# Altium PCB Igor's PCB.PcbDoc
Units mm, origin at the board's own origin, x right, y up, seen from the top; angles counter-clockwise.
Board outline 85 x 80 mm, 4 copper layers (Top Layer, Internal Plane 1, Internal Plane 2, Bottom Layer), stack 1.782 mm thick; 99 components, 55 nets, 302 pads, 0 vias.
Unrouted connection lines stored in the file: 190.
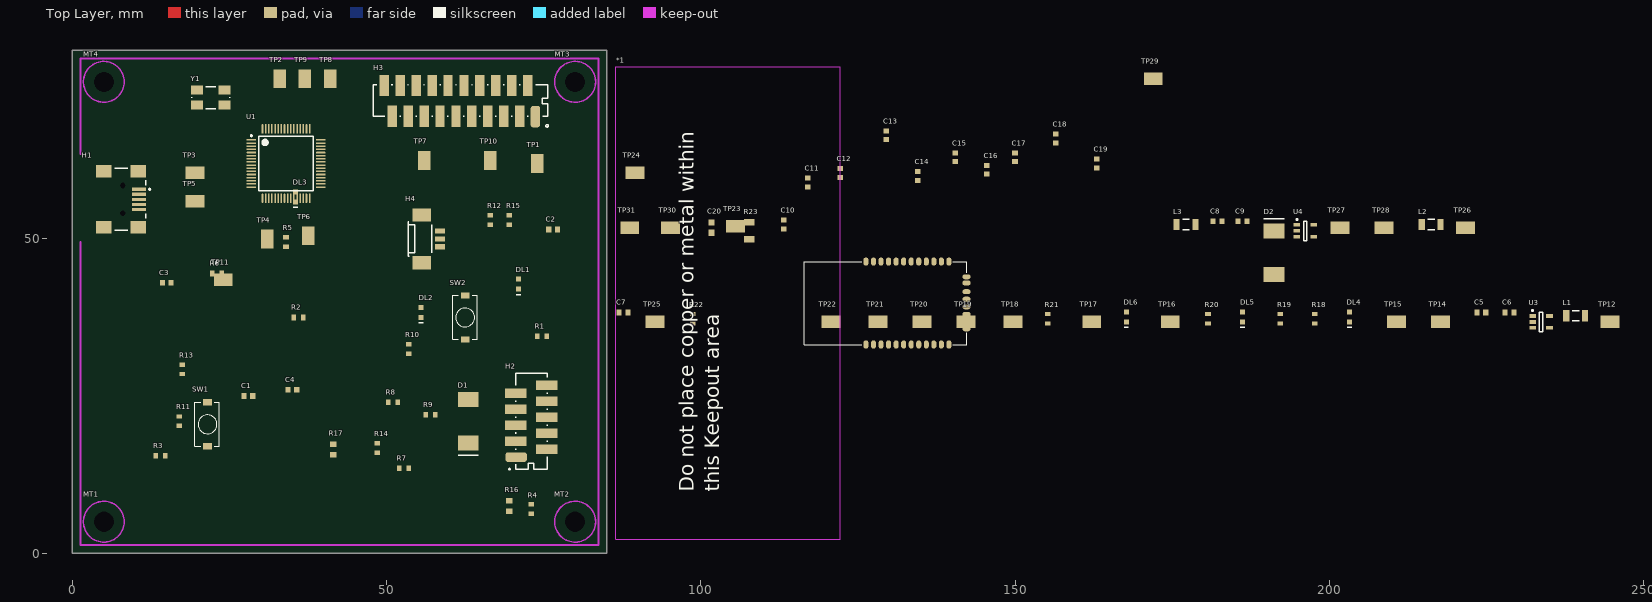
[diagram p0: Top Layer view]
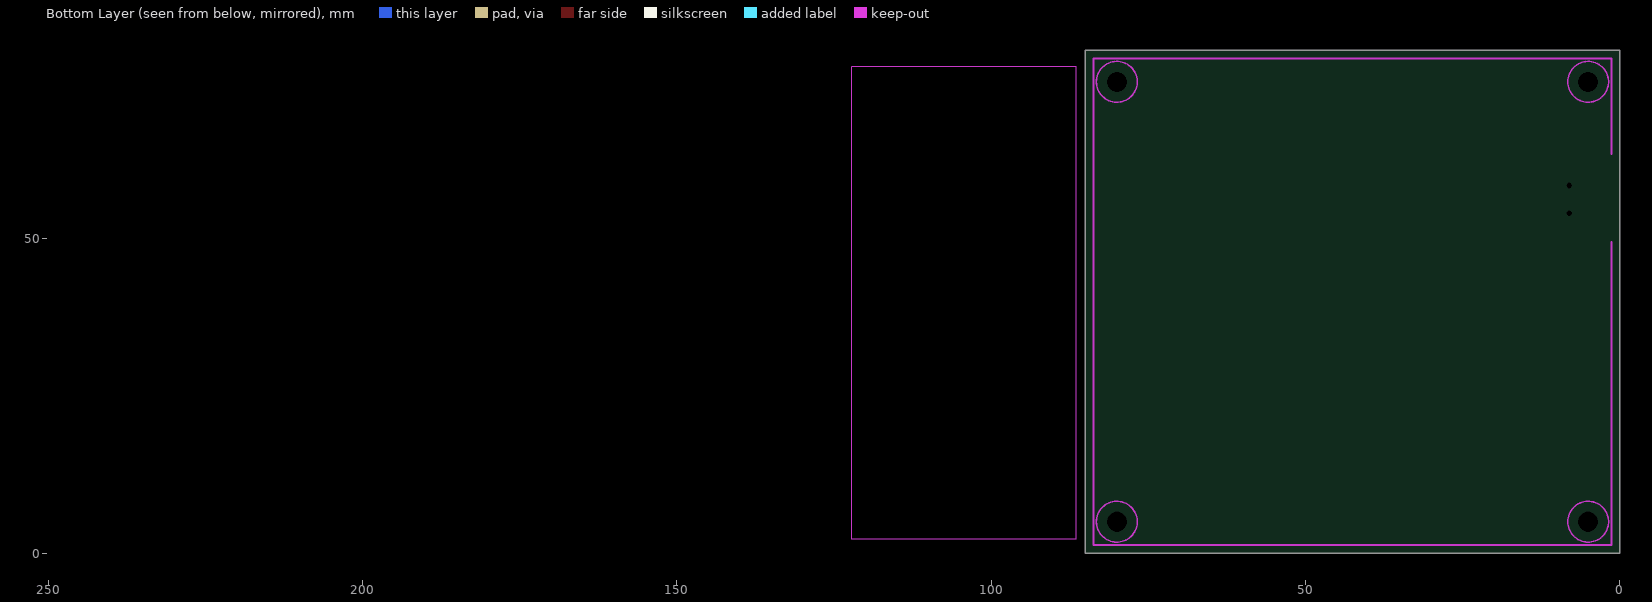
[diagram p1: Bottom Layer view, seen from below]
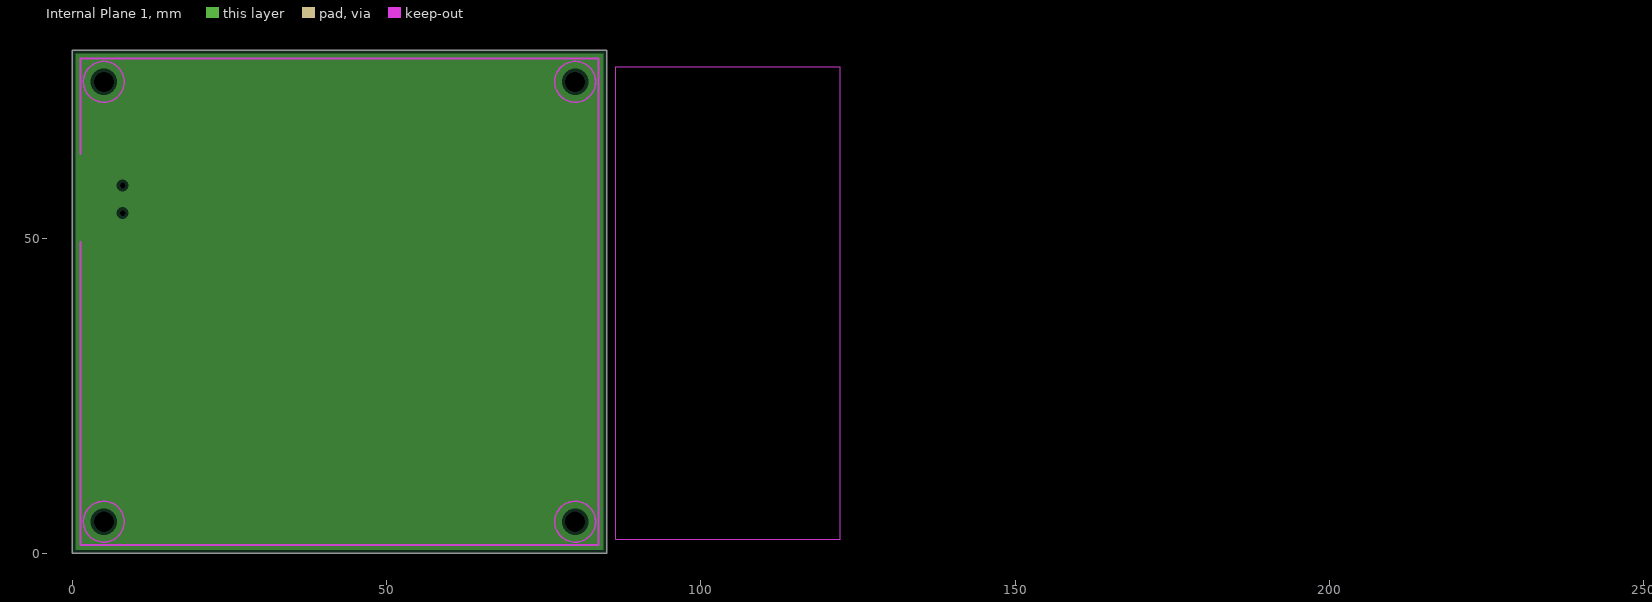
[diagram p2: Internal Plane 1, clearances drawn from the general rule]
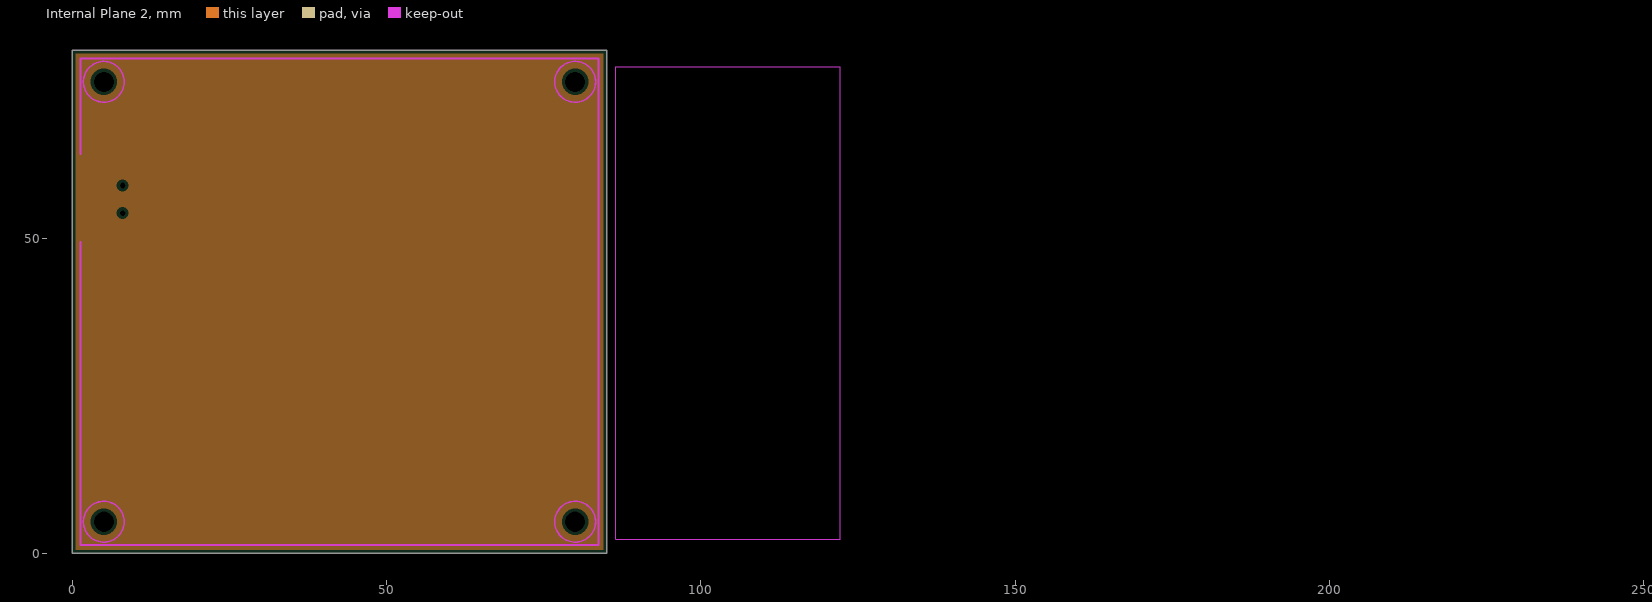
[diagram p3: Internal Plane 2, clearances drawn from the general rule]

## Layer stack, top to bottom
Top Solder: solder mask 0.0102, Solder Resist, Dk 3.5
Top Layer: signal copper 0.0356
Dielectric1: prepreg 0.32, FR-4, Dk 4.8
Internal Plane 1: plane copper 0.0356
Dielectric2: core 1, FR-4, Dk 4.8
Internal Plane 2: plane copper 0.0356
Dielectric3: prepreg 0.32, FR-4, Dk 4.8
Bottom Layer: signal copper 0.0356
Bottom Solder: solder mask 0.0102, Solder Resist, Dk 3.5

## Board outline
0,0 85,0 85,80 0,80

## Design rules (kind name [scope] priority, off if disabled: settings)
Clearance Min_Clearance_Circuit_Labs [All] p1: gap=0.15
DiffPairsRouting [All] p1: maxlimit=0.254 minlimit=0.254 mostfreqgap=0.254 toplayer_minwidth=0.381 toplayer_maxwidth=0.381 toplayer_prefwidth=0.381 bottomlayer_minwidth=0.381 bottomlayer_maxwidth=0.381 bottomlayer_prefwidth=0.381 maxuncoupledlength=12.7
FanoutControl Fanout_BGA [IsBGA] p1 off: bgadir=Out bgaviamode=Centered fanoutstyle=Auto fanoutdirection=Alternating viagrid=0.025 // Fanout_BGA (Default Rule)
HoleSize [All] p1: absolutevalues=TRUE maxlimit=10 minlimit=0.3 maxpercent=80.000 minpercent=20.000
MinimumAnnularRing [All] p1: minimumring=0.1
MinimumSolderMaskSliver [(HasFootprint('LQFP64_L') OR HasFootprint('SOT95P280X145-5N') OR HasFootprint('USB/SM0.8-6H5'))] p1: minsoldermaskwidth=0.11
NetAntennae [All] p1: netantennaetolerance=1
PasteMaskExpansion [All] p1 off: expansion=0.2
PlaneClearance [All] p1: clearance=0.508
PlaneConnect [All] p1: planeconnectstyle=Relief reliefexpansion=0.508 reliefentries=4 reliefconductorwidth=0.254 reliefairgap=0.254
PolygonConnect [All] p1: connectstyle=Relief reliefconductorwidth=0.254 reliefentries=4 polygonreliefangle="90 Angle" airgapwidth=0.254
RoomDefinition Communications_Power [InComponentClass('Communications_Power')] p1: confinementstyle=ConfineIn formatcopy=TRUE lockcomponents=FALSE outline 86.2,42.8 226.199,42.8 226.199,56.3 86.2,56.3
RoomDefinition Communications_Module [InComponentClass('Communications_Module')] p2: confinementstyle=ConfineIn formatcopy=TRUE lockcomponents=FALSE outline 86.2,34.8 248.699,34.8 248.699,41.8 86.2,41.8
RoomDefinition Communications_Board [InComponentClass('Communications_Board')] p3: confinementstyle=ConfineIn formatcopy=TRUE lockcomponents=FALSE outline 1.2,1.3 83.7,1.3 83.7,78.8 1.2,78.8
RoutingVias [All] p1: holewidth=0.5 width=1 viastyle="Through Hole" minholewidth=0.3 minwidth=0.6 maxholewidth=1 maxwidth=2
SMDNeckDown [All] p1 off: percent=50.000
SMDToCorner [All] p1: distance=98425
SMDToPlane [All] p1: distance=1968504
SilkToSolderMaskClearance SilkscreenOverComponentPads [IsPad] p1: minsilkscreentomaskgap=0.254 clearancetoexposedcopper=TRUE
SolderMaskExpansion [All] p1: expansion=0.102
ViasUnderSMD [All] p1: allowed=FALSE
Width [All] p1: maxlimit=2 minlimit=0.15 preferedwidth=0.3
21 further rules are at their usual default settings.

## Classes and differential pairs
component class Communications_Board: C1 C2 C3 C4 D1 DL1 DL2 DL3 H1 H2 H3 H4 MT1 MT2 MT3 MT4 R1 R2 R3 R4 R5 R6 R7 R8 R9 R10 R11 R12 R13 R14 R15 R16 R17 SW1 SW2 TP1 TP2 TP3 TP4 TP5 TP6 TP7 TP8 TP9 TP10 TP11 U1 Y1
component class Communications_Module: *1 C5 C6 C7 DL4 DL5 DL6 L1 R18 R19 R20 R21 R22 TP12 TP14 TP15 TP16 TP17 TP18 TP19 TP20 TP21 TP22 TP23 TP24 TP25 U3
component class Communications_Power: C8 C9 C10 C11 C12 C13 C14 C15 C16 C17 C18 C19 C20 D2 L2 L3 R23 TP26 TP27 TP28 TP29 TP30 TP31 U4
net class *1_Nets: +3V3COMM GND Net*1_2 Net*1_5 Net*1_6 Net*1_7 Net*1_8 Net*1_9 Net*1_10 Net*1_13 Net*1_14 Net*1_15 Net*1_16 Net*1_17 Net*1_18 Net*1_19 Net*1_20 Net*1_21 Net*1_22 Net*1_23 Net*1_24 Net*1_30 Net*1_31 Net*1_32 Net*1_33 Net*1_34 Net*1_35
net class C1_Nets: GND NetC1_2
net class C2_Nets: GND NetC2_2
net class C3_Nets: GND NetC3_2
net class C4_Nets: +3V3 GND
net class C5_Nets: +5VCOMM GND
net class C6_Nets: +3V3COMM GND
net class C7_Nets: +3V3COMM GND
net class C8_Nets: +5V GND
net class C9_Nets: +3V3 GND
net class C10_Nets: +3V3 GND
net class C11_Nets: +3V3 GND
net class C12_Nets: +3V3 GND
net class C13_Nets: +3V3 GND
net class C14_Nets: +3V3 GND
net class C15_Nets: GND VDDOUT
net class C16_Nets: GND VDDOUT
net class C17_Nets: GND VDDOUT
net class C18_Nets: GND VDDOUT
net class C19_Nets: GND NetC19_2
net class C20_Nets: GND NetC20_2
net class D1_Nets: +5V NetC3_2
net class D2_Nets: +5V NetD2_1
net class DL1_Nets: LED1 NetDL1_1
net class DL2_Nets: LED2 NetDL2_1
net class DL3_Nets: LED3 NetDL3_1
net class DL4_Nets: NetDL4_1 NetDL4_2
net class DL5_Nets: +3V3COMM NetDL5_1
net class DL6_Nets: Net*1_19 NetDL6_1
net class H1_Nets: GND NetH1_1 NetH1_4 USB_N USB_P
net class H2_Nets: GND NetC3_2 NetH2_3 NetH2_4 NetH2_9 NetH2_10 SCL SDA
net class H3_Nets: +3V3 GND NetH3_3 NetH3_11 NetH3_17 NetH3_19 NRST TCK TDI TDO TMS
net class H4_Nets: GPIO1 GPIO2 GPIO3
net class L1_Nets: +5VCOMM NetH1_1
net class L2_Nets: NetD2_1 VBUS
net class L3_Nets: NetC19_2 VDDOUT
net class R1_Nets: GND NetDL1_1
net class R2_Nets: GND NetDL2_1
net class R3_Nets: NetR3_1 NetR3_2
net class R4_Nets: GND NetDL3_1
net class R5_Nets: Net*1_16 NetR5_1
net class R6_Nets: Net*1_14 NetR6_1
net class R7_Nets: NetR7_2 USB_P
net class R8_Nets: NetR8_2 USB_N
net class R9_Nets: NetR9_2 SCL
net class R10_Nets: NetR9_2 SDA
net class R11_Nets: +3V3 NRST
net class R12_Nets: +3V3 TDO
net class R13_Nets: +3V3 TCK
net class R14_Nets: +3V3 TMS
net class R15_Nets: +3V3 TDI
net class R16_Nets: +5V "USB DETECT"
net class R17_Nets: GND "USB DETECT"
net class R18_Nets: +3V3COMM Net*1_20
net class R19_Nets: +3V3COMM Net*1_5
net class R20_Nets: Net*1_21 NetDL5_1
net class R21_Nets: GND NetDL6_1
net class R22_Nets: GND Net*1_22
net class R23_Nets: NetC19_2 NetC20_2
net class SW1_Nets: GND NetR3_2
net class SW2_Nets: GND NRST
net class TP1_Nets: +3V3
net class TP2_Nets: ERASE
net class TP3_Nets: USB_N
net class TP4_Nets: NetTP4_1
net class TP5_Nets: USB_P
net class TP6_Nets: NetTP6_1
net class TP7_Nets: NRST
net class TP8_Nets: TDO
net class TP9_Nets: TCK
net class TP10_Nets: TMS
net class TP11_Nets: TDI
net class TP12_Nets: NetH1_1
net class TP14_Nets: GND
net class TP15_Nets: NetTP15_1
net class TP16_Nets: Net*1_20
net class TP17_Nets: +3V3COMM
net class TP18_Nets: NetTP18_1
net class TP19_Nets: Net*1_19
net class TP20_Nets: Net*1_5
net class TP21_Nets: Net*1_16
net class TP22_Nets: Net*1_15
net class TP23_Nets: Net*1_14
net class TP24_Nets: Net*1_22
net class TP25_Nets: Net*1_13
net class TP26_Nets: VBUS
net class TP27_Nets: +3V3
net class TP28_Nets: VDDOUT
net class TP29_Nets: GND
net class TP30_Nets: GND
net class TP31_Nets: GND
net class U1_Nets: +3V3 ERASE GND GPIO1 GPIO2 GPIO3 LED1 LED2 LED3 Net*1_5 Net*1_13 Net*1_15 NetC1_2 NetC2_2 NetC19_2 NetR3_1 NetR5_1 NetR6_1 NetR7_2 NetR8_2 NetR9_2 NetTP4_1 NetTP6_1 NetTP15_1 NetU1_3 NetU1_4 NetU1_5 NetU1_6 NetU1_9 NetU1_10 NetU1_15 NetU1_16 NetU1_19 NetU1_21 NetU1_22 NetU1_27 NetU1_29 NetU1_30 NetU1_32 NetU1_34 NetU1_37 NetU1_59 NetU1_63 NRST SCL SDA TCK TDI TDO TMS "USB DETECT" VDDOUT
net class U3_Nets: +3V3COMM +5VCOMM GND NetTP15_1
net class U4_Nets: +3V3 +5V GND
net class Y1_Nets: NetC1_2 NetC2_2
differential pair USB: +USB_P -USB_N

## Components (designator, comment, footprint, x,y, rotation, side; value= is the part's Value field where it differs from the comment)
*1 "RN41" PCBComponent_1 129.7,39.8 r90 top
C1 "10pF" CAPC1608L 28,25 r0 top
C2 "10pF" CAPC1608L 76.5,51.5 r0 top
C3 "100nF" CAPC1608L 15,43 r0 top
C4 "100nF" CAPC1608L 35,26 r0 top
C5 "10uF" CAPC1608L 224.199,38.3 r0 top
C6 "10uF" CAPC1608L 228.699,38.3 r0 top
C7 "100pF" CAPC1608L 87.7,38.3 r0 top
C8 "10uF" CAPC1608L 182.2,52.8 r0 top
C9 "10uF" CAPC1608L 186.2,52.8 r0 top
C10 "100nF" CAPC1608L 113.2,52.3 r90 top
C11 "100nF" CAPC1608L 117,59 r90 top
C12 "100nF" CAPC1608L 122.175,60.5 r90 top
C13 "100nF" CAPC1608L 129.5,66.5 r90 top
C14 "100nF" CAPC1608L 134.5,60 r90 top
C15 "100nF" CAPC1608L 140.5,63 r90 top
C16 "100nF" CAPC1608L 145.5,61 r90 top
C17 "100nF" CAPC1608L 150,63 r90 top
C18 "100nF" CAPC1608L 156.5,66 r90 top
C19 "100nF" CAPC1608L 163,62 r90 top
C20 "4.7uF" CAPC1608N 101.7,51.8 r90 top
D1 "VS-30BQ015TRPBF" SMC 63,20.975 r270 top
D2 "VS-30BQ015TRPBF" SMC 191.2,47.8 r90 top
DL1 "Dark Green" WL-SMCW0603 71,42 r90 top
DL2 "Yellow" WL-SMCW0603 55.5,37.5 r90 top
DL3 "Red" WL-SMCW0603 35.5,55.9 r90 top
DL4 "Blue" WL-SMCW0603 203.199,36.8 r90 top
DL5 "Blue" WL-SMCW0603 186.2,36.8 r90 top
DL6 "Blue" WL-SMCW0603 167.7,36.8 r90 top
H1 "JS_USB_MINI_B" USB/SM0.8-6H5 2.75,56.3 r180 top
H2 "I2C" 188275-10 73,21 r90 top
H3 "ARM JTAG" 188275-20 61.675,71.961 r180 top
H4 "SMD Horiz 1.25mm" SD-53261-0319 58.5,51.25 r90 top
L1 "Ferrite Bead" INDC3216L 239.199,37.8 r0 top
L2 "Ferrite Bead" INDC3216L 216.199,52.3 r0 top
L3 "Ferrite Bead" INDC3216L 177.2,52.3 r0 top
MT1 "M3.2 NPTH" MNT-HOLE_3.2mm_NPTH 5,5 r0 top
MT2 "M3.2 NPTH" MNT-HOLE_3.2mm_NPTH 80,5 r0 top
MT3 "M3.2 NPTH" MNT-HOLE_3.2mm_NPTH 80,75 r0 top
MT4 "M3.2 NPTH" MNT-HOLE_3.2mm_NPTH 5,75 r0 top
R1 "62R" RESC1608L 74.75,34.5 r0 top
R2 "220R" RESC1608L 36,37.5 r0 top
R3 "2K2" RESC1608L 14,15.5 r0 top
R4 "220R" RESC1608L 73,7 r90 top
R5 "1K" RESC1608L 34,49.5 r90 top
R6 "1K" RESC1608L 23,44.5 r0 top
R7 "27R" RESC1608L 52.75,13.5 r0 top
R8 "27R" RESC1608L 51,24 r0 top
R9 "2K2" RESC1608L 57,22 r0 top
R10 "2K2" RESC1608L 53.5,32.5 r90 top
R11 "100K" RESC1608L 17,21 r90 top
R12 "100K" RESC1608L 66.5,53 r90 top
R13 "100K" RESC1608L 17.5,29.25 r90 top
R14 "100K" RESC1608L 48.5,16.75 r90 top
R15 "100K" RESC1608L 69.5,53 r90 top
R16 "27K" RESC1608N 69.5,7.5 r90 top
R17 "47K" RESC1608N 41.5,16.5 r90 top
R18 "100K" RESC1608L 197.7,37.3 r90 top
R19 "1K" RESC1608L 192.2,37.3 r90 top
R20 "220R" RESC1608L 180.7,37.3 r90 top
R21 "220R" RESC1608L 155.2,37.3 r90 top
R22 "100K" RESC1608L 98.7,37.3 r90 top
R23 "1R" RESC3216L 107.7,51.3 r90 top
SW1 "Sleep/Wake Up" KSR211G 21.5,17 r90 top
SW2 "Reset" KSR211G 62.5,34 r90 top
TP1 "3V3" TP_0805 74,62 r90 top
TP2 "Erase" TP_0805 33,75.5 r90 top
TP3 "USB_N" TP_0805 19.5,60.5 r0 top
TP4 "PA15" TP_0805 31,50 r90 top
TP5 "USB_P" TP_0805 19.5,56 r180 top
TP6 "PA11" TP_0805 37.5,50.5 r90 top
TP7 "nRST" TP_0805 56,62.5 r90 top
TP8 "TDO" TP_0805 41,75.5 r90 top
TP9 "TCK" TP_0805 37,75.5 r90 top
TP10 "TMS" TP_0805 66.5,62.5 r90 top
TP11 "TDI" TP_0805 24,43.5 r0 top
TP12 "V_Bus" TP_0805 244.699,36.8 r0 top
TP14 "Gnd" TP_0805 217.699,36.8 r0 top
TP15 "Gnd" TP_0805 210.699,36.8 r0 top
TP16 "Gnd" TP_0805 174.7,36.8 r0 top
TP17 "Gnd" TP_0805 162.2,36.8 r0 top
TP18 "Gnd" TP_0805 149.7,36.8 r0 top
TP19 "Gnd" TP_0805 142.2,36.8 r0 top
TP20 "Gnd" TP_0805 135.2,36.8 r0 top
TP21 "Gnd" TP_0805 128.2,36.8 r0 top
TP22 "Gnd" TP_0805 120.7,36.8 r0 top
TP23 "Gnd" TP_0805 105.5,52 r0 top
TP24 "Gnd" TP_0805 89.5,60.5 r0 top
TP25 "Gnd" TP_0805 92.7,36.8 r0 top
TP26 "V_Bus" TP_0805 221.699,51.8 r0 top
TP27 "3V3" TP_0805 201.699,51.8 r0 top
TP28 "VddOut" TP_0805 208.699,51.8 r0 top
TP29 "Gnd" TP_0805 172,75.5 r0 top
TP30 "Gnd" TP_0805 95.2,51.8 r0 top
TP31 "Gnd" TP_0805 88.7,51.8 r0 top
U1 "ATSAM4S8BA-ANR" LQFP64_L 34,62 r0 top
U3 "TLV70233DBVR" SOT95P280X145-5N 233.699,36.8 r0 top
U4 "TLV70233DBVR" SOT95P280X145-5N 196.2,51.3 r0 top
Y1 "18.432MHz" 6.0X3.5-4 22,72.5 r0 top

## Footprints (in the part's own frame and the unit in brackets; to place one, negate y for a bottom-side part, rotate by r counter-clockwise, add the part's x,y. Pads: shape width x height; smd on the part's side, far side on the other; paste and mask are expansions set on the pad)
6.0X3.5-4 [mm] "4 SMD 6.0X3.5 mm No Lead Crystal"
  rect 1.9x1.4 smd: 1(-2.2,-1.2) 2(2.2,-1.2) 3(2.2,1.2) 4(-2.2,1.2)
  silkscreen extent -3,-1.75 3,1.75, body extent -3,-1.75 3,1.75, height 1.2
188275-10 [mm] "MicroMatch Ribbon Connector 10 way"
  rrect50% 1.5x3.4 smd: 1(-5.724,2.385)
  rect 1.5x3.4 smd: 2(-4.445,-2.461) 3(-3.175,2.461) 4(-1.905,-2.461) 5(-0.635,2.461) 6(0.635,-2.461) 7(1.905,2.461) 8(3.175,-2.461) 9(4.445,2.461) 10(5.715,-2.461)
  silkscreen extent -7.74,-2.55 7.62,3.57, body extent -7.62,-2.5 7.64,2.43, height 8.45
188275-20 [mm] "MicroMatch Ribbon Connector 20 way"
  rrect50% 1.5x3.4 smd: 1(-12,2.5)
  rect 1.5x3.4 smd: 2(-10.795,-2.461) 3(-9.525,2.461) 4(-8.255,-2.461) 5(-6.985,2.461) 6(-5.715,-2.461) 7(-4.445,2.461) 8(-3.175,-2.461) 9(-1.905,2.461) 10(-0.635,-2.461) 11(0.635,2.461) 12(1.905,-2.461) 13(3.175,2.461) 14(4.445,-2.461) 15(5.715,2.461) 16(6.985,-2.461) 17(8.255,2.461) 18(9.525,-2.461) 19(10.795,2.461) 20(12.065,-2.461)
  silkscreen extent -14.06,-2.54 13.83,4.16, body extent -13.96,-2.54 13.93,2.46, height 8.45
CAPC1608L [mm] "Chip Capacitor, Body 1.6x0.8mm, IPC High Density"
  rect 0.8x0.9 smd: 1(-0.7,0) 2(0.7,0)
  body extent -0.87,-0.48 0.87,0.48, height 0.85
CAPC1608N [mm] "Chip Capacitor, Body 1.6x0.8mm, IPC Medium Density"
  rect 1x1 smd: 1(-0.8,0) 2(0.8,0)
  body extent -0.87,-0.48 0.87,0.48, height 0.85
INDC3216L [mm] "Chip Inductor, Body 3.2x1.6mm, IPC High Density"
  rect 1x1.8 smd: 1(-1.5,0) 2(1.5,0)
  silkscreen extent -0.55,-0.8 0.55,0.8, body extent -1.75,-0.95 1.75,0.95, height 1.9
KSR211G [mm] "Subminature Tactile Switch in SMT"
  rect 1x1.4 smd: 1(0,0) 2(7,0)
  silkscreen extent 0,-1.9 7,2, body extent 0,-1.9 7,2, height 4.25
LQFP64_L [mm] "Thin QFP, 64-Leads, Body 10x10mm, Pitch 0.5mm, IPC High Density"
  oval 1.55x0.25 smd mask+0.07: 1(-5.525,3.75) 2(-5.525,3.25) 3(-5.525,2.75) 4(-5.525,2.25) 5(-5.525,1.75) 6(-5.525,1.25) 7(-5.525,0.75) 8(-5.525,0.25) 9(-5.525,-0.25) 10(-5.525,-0.75) 11(-5.525,-1.25) 12(-5.525,-1.75) 13(-5.525,-2.25) 14(-5.525,-2.75) 15(-5.525,-3.25) 16(-5.525,-3.75) 33(5.525,-3.75) 34(5.525,-3.25) 35(5.525,-2.75) 36(5.525,-2.25) 37(5.525,-1.75) 38(5.525,-1.25) 39(5.525,-0.75) 40(5.525,-0.25) 41(5.525,0.25) 42(5.525,0.75) 43(5.525,1.25) 44(5.525,1.75) 45(5.525,2.25) 46(5.525,2.75) 47(5.525,3.25) 48(5.525,3.75)
  oval 0.25x1.55 smd mask+0.07: 17(-3.75,-5.525) 18(-3.25,-5.525) 19(-2.75,-5.525) 20(-2.25,-5.525) 21(-1.75,-5.525) 22(-1.25,-5.525) 23(-0.75,-5.525) 24(-0.25,-5.525) 25(0.25,-5.525) 26(0.75,-5.525) 27(1.25,-5.525) 28(1.75,-5.525) 29(2.25,-5.525) 30(2.75,-5.525) 31(3.25,-5.525) 32(3.75,-5.525) 49(3.75,5.525) 50(3.25,5.525) 51(2.75,5.525) 52(2.25,5.525) 53(1.75,5.525) 54(1.25,5.525) 55(0.75,5.525) 56(0.25,5.525) 57(-0.25,5.525) 58(-0.75,5.525) 59(-1.25,5.525) 60(-1.75,5.525) 61(-2.25,5.525) 62(-2.75,5.525) 63(-3.25,5.525) 64(-3.75,5.525)
  silkscreen extent -5.65,-4.35 4.35,4.55, body extent -5,-5 5,5, height 1.6
MNT-HOLE_3.2mm_NPTH [mm] "Mounting Hole 3.2mm non plated"
  round 0 hole 3.2 unplated: 1(0,0)
  Keep-Out Layer circle w0.254: c0,0 r3.25
PCBComponent_1 [mm]
  oval 1.3x0.8 smd: 1(-6.6,3.425) 2(-6.6,2.225) 3(-6.6,1.025) 4(-6.6,-0.175) 5(-6.6,-1.375) 6(-6.6,-2.575) 7(-6.6,-3.775) 8(-6.6,-4.975) 9(-6.6,-6.175) 10(-6.6,-7.375) 11(-6.6,-8.575) 12(-6.6,-9.775) 13(6.6,-9.775) 14(6.6,-8.575) 15(6.6,-7.375) 16(6.6,-6.175) 17(6.6,-4.975) 18(6.6,-3.775) 19(6.6,-2.575) 20(6.6,-1.375) 21(6.6,-0.175) 22(6.6,1.025) 23(6.6,2.225) 24(6.6,3.425)
  oval 0.8x1.3 smd: 28(3.2,-12.575) 29(-3.1,-12.575) 30(4.175,-12.575) 31(1.8,-12.575) 32(0.6,-12.575) 33(-0.6,-12.575) 34(-1.8,-12.575) 35(-4.1,-12.575)
  Keep-Out Layer lines w0.1: -37.6,43.225 -37.6,7.525 37.6,7.525 37.6,43.225 -37.6,43.225
  silkscreen extent -6.6,-12.57 6.6,13.23, body extent -6.55,-12.52 6.55,13.18, height 2.1
RESC1608L [mm] "Chip Resistor, Body 1.6x0.8mm, IPC High Density"
  rect 0.7x0.9 smd: 1(-0.75,0) 2(0.75,0)
  body extent -0.85,-0.48 0.85,0.48, height 0.9
RESC1608N [mm] "Chip Resistor, Body 1.6x0.8mm, IPC Medium Density"
  rect 0.9x1 smd: 1(-0.85,0) 2(0.85,0)
  body extent -0.85,-0.48 0.85,0.48, height 0.6
RESC3216L [mm] "Chip Resistor, Body 3.1x1.6mm, IPC High Density"
  rect 1.1x1.7 smd: 1(-1.35,0) 2(1.35,0)
  body extent -1.68,-0.87 1.68,0.87, height 2.54
SD-53261-0319 [mm] "Molex Pico Blade 3 Pos Horiz SMD Header"
  rect 0.8x1.6 smd: 1(0,0) 2(-1.25,0)
  rect 0.81x1.6 smd: 3(-2.5,0)
  rect 2.1x3 smd: M(-5.05,2.9) M(2.55,2.9)
  silkscreen extent -3.98,1.3 1.5,5.05, body extent -3.88,1.13 1.4,4.94, height 3.45
SMC [mm] "DO-214-AB/SMC; 2 C-Bend Leads; Body 7.9 x 5.9 mm, inc. leads (LxW)"
  rect 2.4x3.3 smd: 1(-3.475,0) 2(3.475,0)
  silkscreen extent 5.43,-1.6 5.43,1.6
SOT95P280X145-5N [mm] "SOT23, 5-Leads, Body 2.90x2.80mm, Pitch 0.95mm, IPC Medium Density"
  rect 1.05x0.6 smd: 1(-1.35,0.95) 2(-1.35,0) 3(-1.35,-0.95) 4(1.35,-0.95) 5(1.35,0.95)
  silkscreen extent -1.47,-1.55 0.25,1.92, body extent -0.87,-1.52 0.87,1.53, height 1.45
TP_0805 [mm] "TestPoint SMD"
  rect 3x2 smd: 1(0,0)
  body extent -1.5,-1 1.5,1.1, height 1.4
USB/SM0.8-6H5 [mm] "Connector; USB2.0, Type B, SM; 5 Position; Right Angle"
  rect 2.3x0.5 smd mask+0.07: 1(-7.85,-1.6) 2(-7.85,-0.8) 3(-7.85,0) 4(-7.85,0.8) 5(-7.85,1.6)
  rect 2.5x2 smd: 6(-7.75,4.45) 7(-2.25,4.45) 8(-7.75,-4.45) 9(-2.25,-4.45)
  round 0.6 hole 0.9 unplated: MH1(-5.25,2.2) MH2(-5.25,-2.2)
  silkscreen extent -9.68,-4.95 -3.95,4.95, body extent -8.9,-4.95 0.7,4.95, height 3.9
WL-SMCW0603 [mm] "2.4 x 0.8 x 0.7mm LED"
  rect 0.8x0.8 smd: 1(0,0) 2(1.6,0)
  silkscreen extent -0.85,-0.35 -0.85,0.35

## Part data
*1: "Bluetooth RN41"
C1 C2: library part CC_10pF_0603, "CAP CER 10pF COG/NPO 50V 0603"
C3 C4 C10 C11 C12 C13 C14 C15 C16 C17 C18 C19: library part CC_100nF_0603, "CAP CER 100nF X7R +-10% 50V 0603"
C5 C6 C8 C9: library part CC_10uF_0603, "CAP CER 10UF X5R +-20% 10V 0603"
C7: library part CC_100pF_0603, "CAP CER 100pF NPO/COG +-5% 50V 0603"
C20: library part CC_4.7uF_0603, "CAP CER 4.7uF X5R +-20%  10V 0603"
D1 D2: library part DS_VS-30BQD015TRPBF, "DIODE SCHOTTKY 15V 3A SMC"
DL1: library part DL_150060GS75000, "LED Dk Green 430mcd 0603 SMD"
DL2: library part DL_150060YS75000, "LED Yellow 120mcd 0603 SMD"
DL3: library part DL_150060RS75000, "LED Red 250mcd 0603 SMD"
DL4 DL5 DL6: library part DL_150060BS75000, "LED Blue 270mcd 0603 SMD"
H1: library part JS_USB_MINI_B_SMT, "USB 2.0, Right Angle, SMT, B Type, Receptacle, 5 Position,"
H2: library part JB_HDR_IDC_5X2_VERT, "IDC Header, 1,27mm, 10-Pin, Vert, SMT"
H3: library part JB_HDR_IDC_10X2_VERT, "IDC Header, 1,27mm, 20-Pin, Vert, SMT"
H4: library part JB_53261-03, "Header_Horiz_3Pos_1.25mm_125V@1A_SMT"
L1 L2 L3: library part IN_Ferrite-Bead, "Ferrite Bead, Rdc 0.3R, Z100MHZ 600R, Imax 1A, SMD 1206"
MT1 MT2 MT3 MT4: library part MC_M3.2_HOLE, "Fixing M3.2 Mount Hole NPTH"
R1: library part RS_62R, "RES 62 OHM 1/10W 5% 0603 SMD"
R2 R4 R20 R21: library part RS_220R, "RES 220 OHM 1/10W 5% 0603 SMD"
R3 R9 R10: library part RS_2K2, "RES 2.2K OHM 1/10W 5% 0603 SMD"
R5 R6 R19: library part RS_1K, "RES 1.0K OHM 1/10W 5% 0603 SMD"
R7 R8: library part RS_27R, "RES 27 OHM 1/10W 5% 0603 SMD"
R11 R12 R13 R14 R15 R18 R22: library part RS_100K, "RES 100K OHM 1/10W 5% 0603 SMD"
R16: library part RS_27K, "RES 27K OHM 1/10W 5% 0603 SMD"
R17: library part RS_47K, "RES 47.0K OHM 1/10W 5% 0603 SMD"
R23: library part RT_1R, "RES 1R OHM 1/4W 5% 1206 SMD"
SW1 SW2: library part "WS_KSR211G LFS", "SWITCH TACTILE SPST-NO SMD"
TP1 TP2 TP3 TP4 TP5 TP6 TP7 TP8 TP9 TP10 TP11 TP12 TP14 TP15 TP16 TP17 TP18 TP19 TP20 TP21 TP22 TP23 TP24 TP25 TP26 TP27 TP28 TP29 TP30 TP31: library part TP_0805, "Test Point 2.0X0.9X1.2mm SMD"
U1: library part SE_ATSAM4S16BA-MU, "IC MCU 32BIT 512KB FLASH 64LQFP"
U3 U4: library part SV_TLV70233DBVR, "IC REG LDO 3.3V 0.3A SOT23-5"
Y1: library part XT_CRYSTAL_18.432MHz_13pF, "18.432 MHZ 4PF  6.0X3.5mm SMD"

## Nets (pads, with @x,y where several pads share a name; then routed paths per layer and width w, separated by ;. In a path a pad name is that pad's centre, name@x,y a point inside that pad or via, vN(x,y) a via of type N, cw(c..) or ccw(c..) an arc to the next point about the centre after c; other vN are vias at no path point)
+3V3: C4.2 C9.1 C10.2 C11.2 C12.2 C13.2 C14.2 H3.1 H3.2 R11.2 R12.2 R13.2 R14.2 R15.2 TP1.1 TP27.1 U1.1 U1.7 U1.18 U1.45 U1.58 U4.5
+3V3COMM: *1.3 *1.4 *1.11 C6.1 C7.2 DL5.2 R18.2 R19.2 TP17.1 U3.5
+5V: C8.1 D1.2 D2.2 R16.2 U4.1 U4.3
+5VCOMM: C5.1 L1.2 U3.1
ERASE: TP2.1 U1.55
GND: *1.1 *1.12 *1.28 *1.29 C1.1 C2.1 C3.1 C4.1 C5.2 C6.2 C7.1 C8.2 C9.2 C10.1 C11.1 C12.1 C13.1 C14.1 C15.1 C16.1 C17.1 C18.1 C19.1 C20.1 H1.5 H1.6 H1.7 H1.8 H1.9 H2.2 H2.6 H2.8 H3.4 H3.6 H3.8 H3.10 H3.12 H3.14 H3.16 H3.18 H3.20 R1.2 R2.2 R4.2 R17.1 R21.2 R22.1 SW1.2 SW2.2 TP14.1 TP29.1 TP30.1 TP31.1 U1.2 U1.17 U1.40 U1.46 U1.50 U1.60 U3.2 U3.4 U4.2 U4.4
GPIO1: H4.1 U1.52
GPIO2: H4.2 U1.42
GPIO3: H4.3 U1.41
LED1: DL1.2 U1.48
LED2: DL2.2 U1.47
LED3: DL3.2 U1.44
Net*1_5: *1.5 R19.1 TP20.1 U1.13
Net*1_13: *1.13 TP25.1 U1.14
Net*1_14: *1.14 R6.2 TP23.1
Net*1_15: *1.15 TP22.1 U1.25
Net*1_16: *1.16 R5.2 TP21.1
Net*1_19: *1.19 DL6.2 TP19.1
Net*1_20: *1.20 R18.1 TP16.1
Net*1_21: *1.21 R20.1
Net*1_22: *1.22 R22.2 TP24.1
NetC1_2: C1.2 U1.62 Y1.3
NetC2_2: C2.2 U1.61 Y1.1
NetC3_2: C3.2 D1.1 H2.1
NetC19_2: C19.2 L3.1 R23.2 U1.64
NetC20_2: C20.2 R23.1
NetD2_1: D2.1 L2.2
NetDL1_1: DL1.1 R1.1
NetDL2_1: DL2.1 R2.1
NetDL3_1: DL3.1 R4.1
NetDL5_1: DL5.1 R20.2
NetDL6_1: DL6.1 R21.1
NetH1_1: H1.1 L1.1 TP12.1
NetR3_1: R3.1 U1.26
NetR3_2: R3.2 SW1.1
NetR5_1: R5.1 U1.23
NetR6_1: R6.1 U1.11
NetR7_2: R7.2 U1.57
NetR8_2: R8.2 U1.56
NetR9_2: R9.2 R10.2 U1.31
NetTP4_1: TP4.1 U1.20
NetTP6_1: TP6.1 U1.28
NetTP15_1: TP15.1 U1.38 U3.3
NRST: H3.15 R11.1 SW2.1 TP7.1 U1.39
SCL: H2.5 R9.1 U1.36
SDA: H2.7 R10.1 U1.43
TCK: H3.9 R13.1 TP9.1 U1.53
TDI: H3.5 R15.1 TP11.1 U1.33
TDO: H3.13 R12.1 TP8.1 U1.49
TMS: H3.7 R14.1 TP10.1 U1.51
"USB DETECT": R16.1 R17.2 U1.35
USB_N: H1.2 R8.1 TP3.1
USB_P: H1.3 R7.1 TP5.1
VBUS: L2.1 TP26.1
VDDOUT: C15.2 C16.2 C17.2 C18.2 L3.2 TP28.1 U1.8 U1.12 U1.24 U1.54
pads on no net: *1.2 *1.6 *1.7 *1.8 *1.9 *1.10 *1.17 *1.18 *1.23 *1.24 *1.30 *1.31 *1.32 *1.33 *1.34 *1.35 DL4.1 DL4.2 H1.4 H1.MH1 H1.MH2 H2.3 H2.4 H2.9 H2.10 H3.3 H3.11 H3.17 H3.19 H4.M MT1.1 MT2.1 MT3.1 MT4.1 TP18.1 U1.3 U1.4 U1.5 U1.6 U1.9 U1.10 U1.15 U1.16 U1.19 U1.21 U1.22 U1.27 U1.29 U1.30 U1.32 U1.34 U1.37 U1.59 U1.63 Y1.2 Y1.4

## Polygon pours and split planes (outlines as drawn)
no net on Internal Plane 1 (split plane): 84.49,0.51 0.51,0.51 0.51,79.49 84.49,79.49
no net on Internal Plane 2 (split plane): 84.49,0.51 0.51,0.51 0.51,79.49 84.49,79.49

## Keep-outs
Keep-Out Layer:
  lines w0.3: 1.3,49.5 1.3,1.3 83.7,1.3 83.7,78.7 1.3,78.7 1.3,63.5

## Silkscreen, mask and mechanical layers (free items; w line width, h text height)
PCB Boundary:
  the board outline again, w0.3
Drill Drawing:
  text ".LEGEND" at 90.08,5.08 h0.8
  text "Drill Drawing." at 90.08,2.54 h0.8

## Dimensions
0,0 to 0,80 on Dimension
0,0 to 85,0 on Dimension

## Text inside footprints (layer, text, board x,y; h text height)
*1: Top Overlay "Do not place copper or metal within  / this Keepout area" at 103.7,9.8 h4 r90
H1: Dimension "PCB Edge" at 2.318,60.336 h0.25 r270